# Altium PCB Test_Monitor_PCB1.PcbDoc (part 3 of 3)
Units mm, origin at the board's own origin, x right, y up, seen from the top; angles counter-clockwise.
Board outline 100 x 83 mm, 4 copper layers (Top Layer, GND1, GND2, Bottom Layer), stack 1.57 mm thick; 215 components, 124 nets, 896 pads, 300 vias.
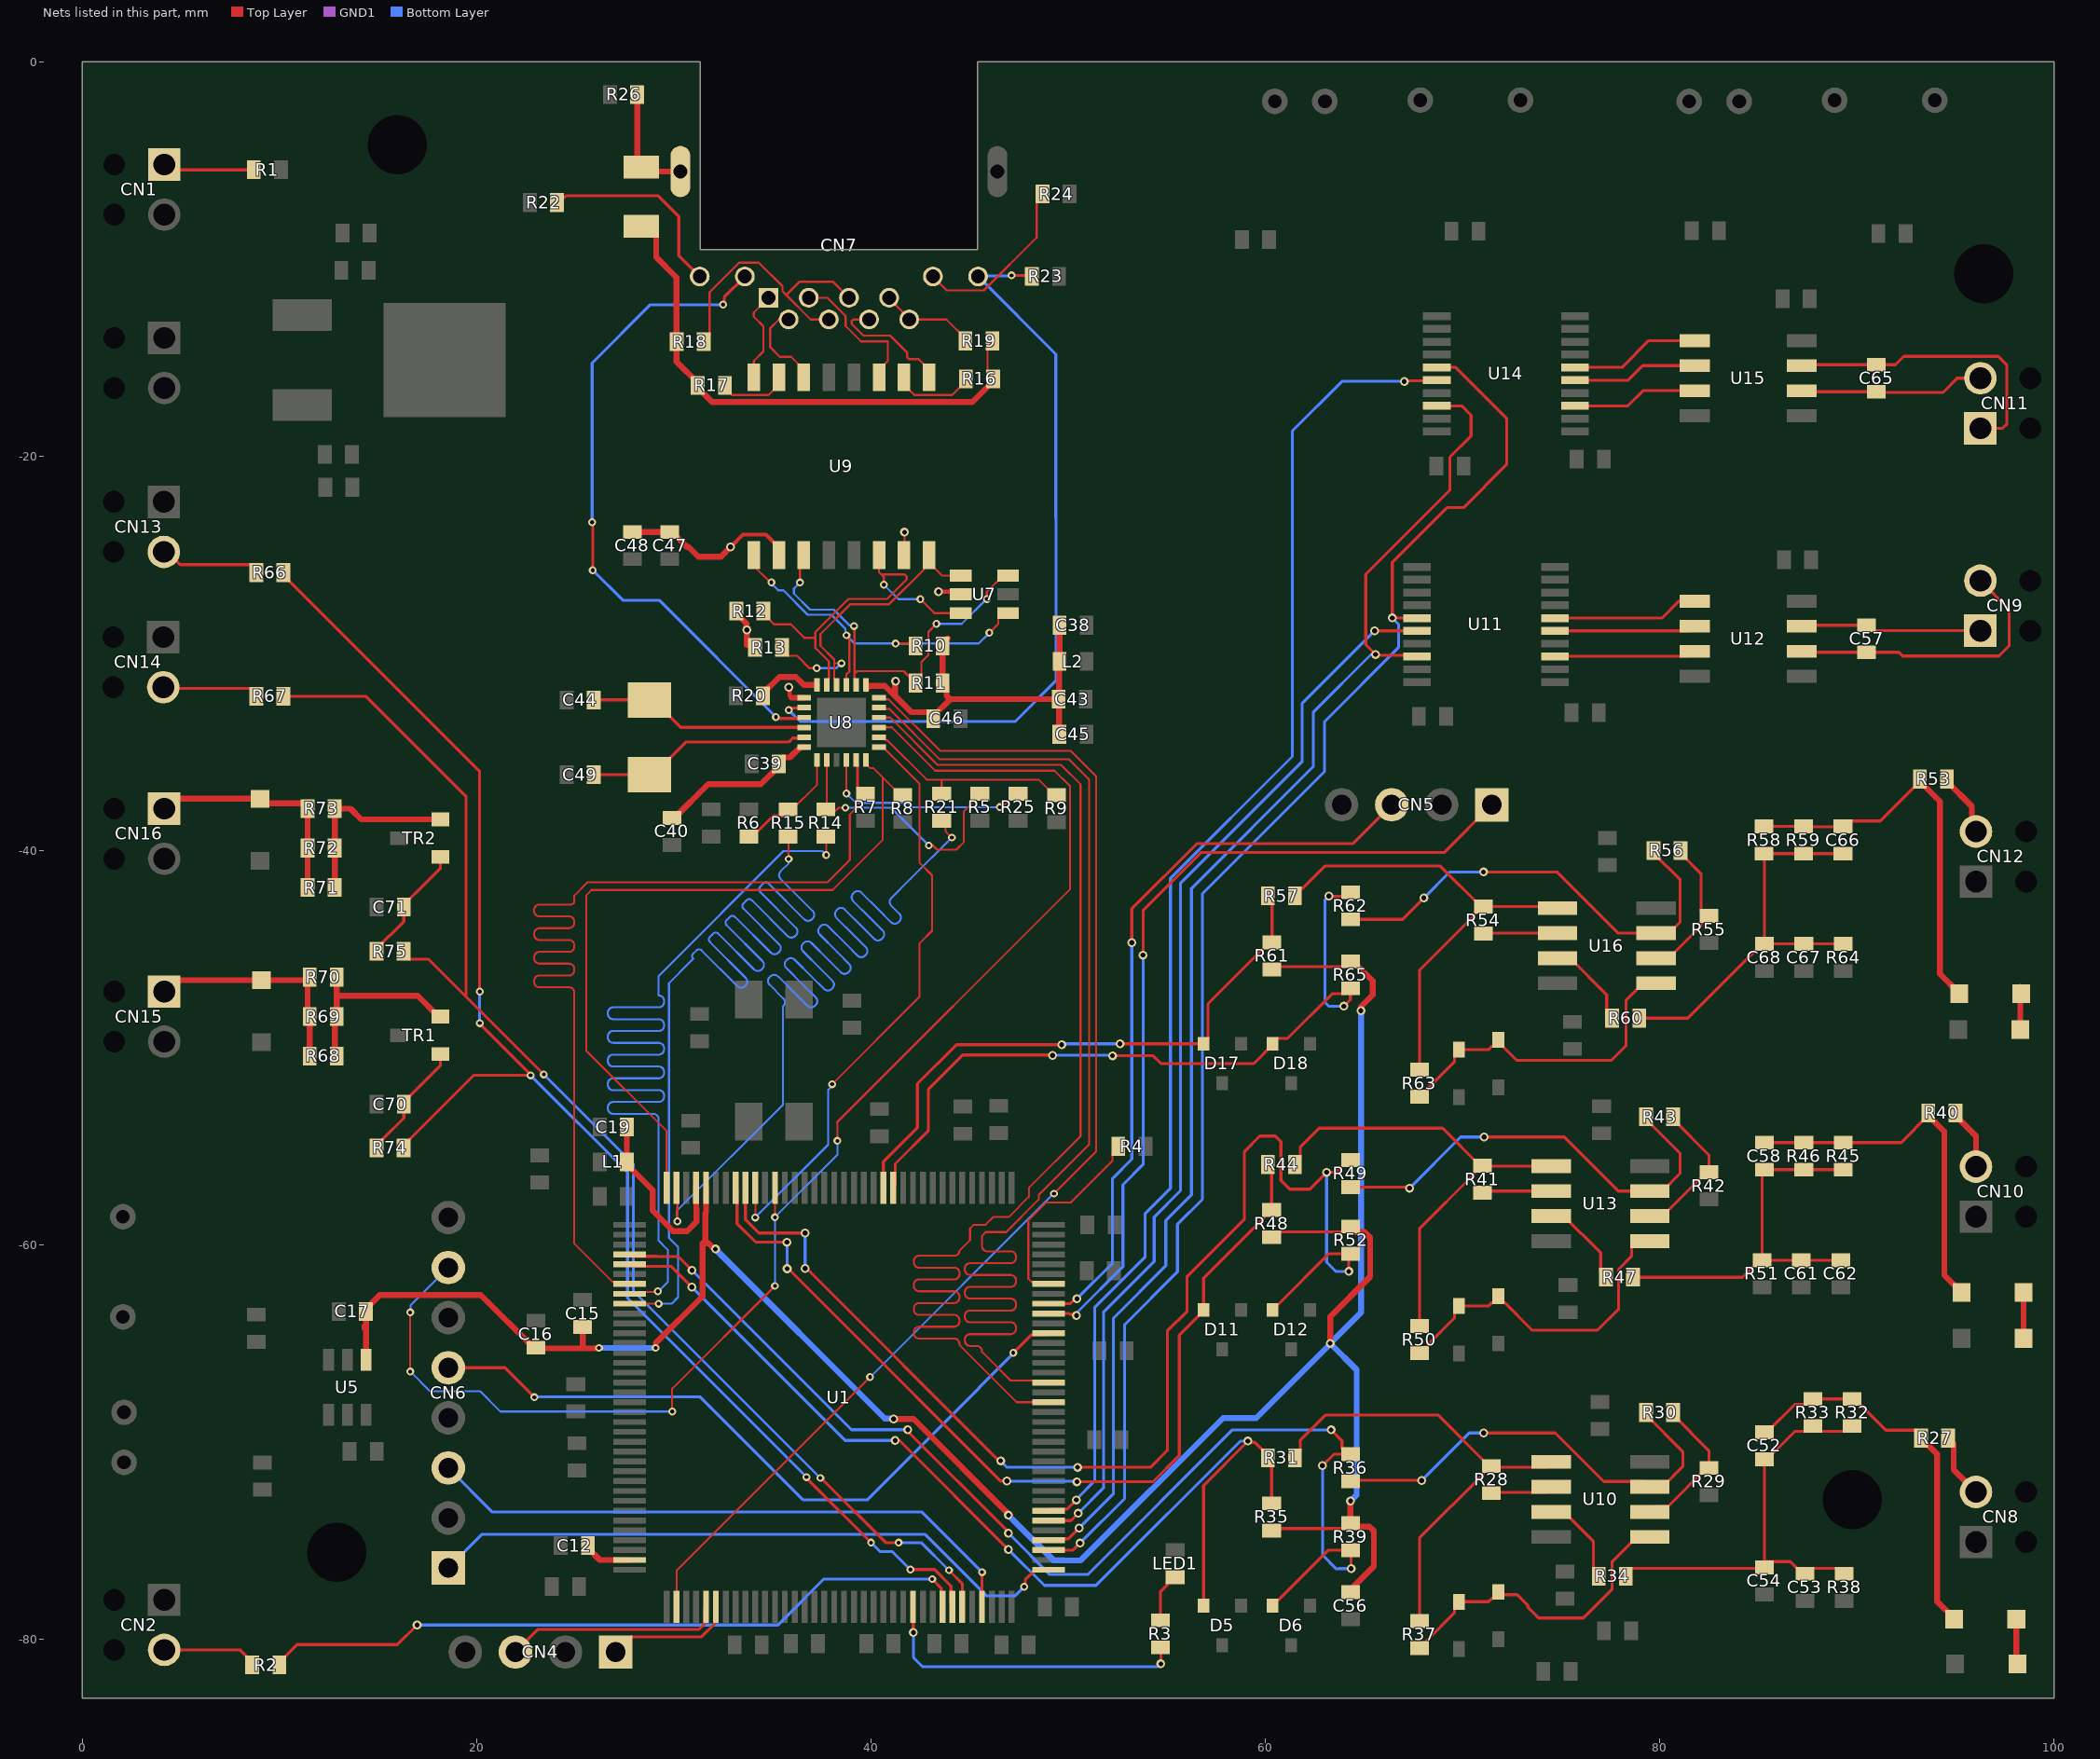
[diagram p4: the nets of this part, all layers, seen from the top]

## Via types
v1: diameter 0.45, hole 0.25, Top Layer to Bottom Layer, 224 vias
v2: diameter 0.4, hole 0.2, Top Layer to Bottom Layer, 66 vias
v3: diameter 0.7, hole 0.4, Top Layer to Bottom Layer, 8 vias
v4: diameter 0.66, hole 0.33, Top Layer to Bottom Layer, 2 vias

## Nets (pads, with @x,y where several pads share a name; then routed paths per layer and width w, separated by ;. In a path a pad name is that pad's centre, name@x,y a point inside that pad or via, vN(x,y) a via of type N, cw(c..) or ccw(c..) an arc to the next point about the centre after c; other vN are vias at no path point) (continued)
NetC12_1: C12.1 U1.71 | length 2.5
  Top Layer w0.3: C12.1@25.637,-75.25 25.637,-75.375 26.243,-75.98 U1.71@27.755,-75.98
NetC19_2: C19.2 L1.2 U1.33 | length 9.5
  Top Layer w0.3: L1.2@27.613,-55.788 27.613,-55.893 L1.2@27.616,-55.896 ; C19.2@27.613,-54.025 27.616,-54.029 L1.2@27.616,-55.896 ; U1.33@31.13,-57.105 31.13,-57.78 31.135,-57.785 31.135,-58.147 31.153,-58.165 31.153,-58.817 30.667,-59.303 29.969,-59.303 28.92,-58.253 28.92,-57.22 27.616,-55.916 L1.2@27.616,-55.896
NetC38_2: C38.2 C43.2 C45.2 C46.2 C47.2 C48.2 L2.1 R10.2 R11.2 R12.2 R13.2 U7.5 U8.1 U8.19 U9.2 U9.7 | length 36.1
  Top Layer w0.11: U9.7@41.675,-24.775 U9.7@41.675,-25.01 41.7,-24.985 41.7,-24.75 v1(41.7,-23.85)
  Top Layer w0.2: C47.2@29.79,-23.841 C47.2@29.915,-23.841 ; 30.665,-24.591 30.74,-24.591 ; v1(32.878,-24.6) 33.503,-23.975 34.67,-23.975 35.325,-24.63 U9.2@35.325,-25.01 ; R12.2@33.162,-27.85 R12.2@33.162,-27.832 ; R13.2@33.991,-29.578 R13.2@34.112,-29.7 ; v1(35.825,-31.715) 35.873,-31.763 35.873,-32.149 35.974,-32.25 ; U9.7@41.675,-24.775 U9.7@41.7,-24.75 ; v1(43.425,-26.871) 44.421,-26.871 U7.5@44.55,-27
  Top Layer w0.3: C48.2@27.895,-23.841 C47.2@29.79,-23.841 ; C47.2@29.915,-23.841 30.665,-24.591 ; 30.74,-24.591 31.24,-25.091 32.387,-25.091 v1(32.878,-24.6) ; R12.2@33.162,-27.85 33.162,-27.975 33.671,-28.484 33.671,-28.771 v1(33.7,-28.8) 33.7,-29.578 R13.2@33.991,-29.578 ; 35.974,-32.25 U8.1@36.6,-32.25 ; U8.19@39.75,-31.805 39.916,-31.639 40.698,-31.639 41.159,-32.1 ; v1(41.25,-31.41) 41.221,-31.439 41.221,-32.038 41.159,-32.1 ; C46.2@43.157,-33.305 C46.2@43.157,-33.18 ; R10.2@43.883,-29.239 43.633,-29.489 R10.2@43.633,-29.614 R11.2@43.633,-31.5 43.833,-31.7 43.833,-32.136 44.017,-32.32 ; C45.2@49.557,-34.225 C45.2@49.557,-34.1 49.535,-34.078 49.535,-32.343 C43.2@49.512,-32.32 ; C38.2@49.562,-28.57 L2.1@49.563,-30.411 49.538,-30.436 49.538,-32.295 C43.2@49.512,-32.32 ; 41.159,-32.1 42.039,-32.98 42.957,-32.98 C46.2@43.157,-33.18 ; C46.2@43.157,-33.18 44.017,-32.32 ; 44.017,-32.32 C43.2@49.512,-32.32
NetC39_2: C39.2 C40.2 U8.6 | length 8.3
  Top Layer w0.3: C40.2@29.9,-38.342 30.025,-38.342 31.742,-36.625 34.417,-36.625 35.317,-35.725 C39.2@35.317,-35.6 35.317,-35.475 35.518,-35.275 35.89,-35.275 36.415,-34.75 U8.6@36.6,-34.75
NetC42_1: C42.1 CN7.13 R26.2 | length 5.8
  Top Layer w0.3: R26.2@28.139,-1.65 28.139,-5.116 28.583,-5.56 CN7.13@30.33,-5.56
NetC42_2: C42.2 R16.1 R17.1 R18.1 R19.1 | length 27.7
  Top Layer w0.11: R19.1@46.162,-14.15 45.912,-14.4 45.912,-15.8 R16.1@46.187,-16.075
  Top Layer w0.3: C42.2@28.35,-8.327 28.675,-8.327 29.1,-8.752 29.1,-9.897 30.138,-10.935 R18.1@30.138,-14.065 ; R18.1@29.937,-13.865 R18.1@30.138,-14.065 ; R17.1@31.213,-16.4 31.213,-16.525 31.938,-17.25 45.137,-17.25 46.187,-16.2 R16.1@46.187,-16.075 ; R17.1@31.213,-16.275 30.138,-15.2 R18.1@30.138,-14.19 R18.1@30.138,-14.065
NetC44_2: C44.2 U8.4 X2.2 | length 11.4
  Top Layer w0.147: C44.2@25.935,-32.355 X2.2@28.75,-32.355 ; U8.4@36.6,-33.75 30.345,-33.75 X2.2@28.95,-32.355 ; X2.2@28.75,-32.355 X2.2@28.95,-32.355 ; X2.2@28.75,-32.355 X2.2@28.95,-32.355
NetC49_2: C49.2 U8.5 X2.1 | length 11.5
  Top Layer w0.147: C49.2@25.935,-36.155 X2.1@28.75,-36.155 28.95,-36.155 30.605,-34.5 35.82,-34.5 36.03,-34.29 36.56,-34.29 U8.5@36.6,-34.25
NetC52_1: C52.1 C53.2 C54.2 R32.1 R33.1 R34.1 R38.2 | length 22.4
  Top Layer w0.15: R34.1@78.287,-76.8 78.287,-76.675 78.562,-76.4 85.272,-76.4 C54.2@85.318,-76.354 C54.2@85.318,-76.062 ; C52.1@85.318,-71.175 C54.2@85.318,-76.062 ; C52.1@85.318,-70.875 85.442,-70.875 86.855,-69.462 87.493,-69.462 R33.1@87.768,-69.187 88.043,-69.462 89.493,-69.462 R32.1@89.768,-69.187 ; C53.2@87.318,-76.679 87.593,-76.404 89.093,-76.404 R38.2@89.368,-76.679 ; C53.2@87.368,-76.679 87.243,-76.679 86.626,-76.062 C54.2@85.318,-76.062
NetC52_2: C52.2 D1.1 R27.2 R32.2 R33.2 | length 19.1
  Top Layer w0.15: C52.2@85.318,-69.5 85.442,-69.5 86.855,-68.087 87.493,-68.087 R33.2@87.768,-67.812 89.893,-67.812 91.48,-69.4 92.987,-69.4 93.262,-69.675 R27.2@93.262,-69.8
  Top Layer w0.3: R27.2@93.509,-70.046 94.077,-70.614 94.077,-78.082 94.945,-78.95 D1.1@94.945,-78.975
NetC57_1: C57.1 CN9.1 U12.3 | length 9.2
  Top Layer w0.15: U12.3@87.212,-28.62 87.264,-28.568 C57.1@90.5,-28.568 90.775,-28.843 96.263,-28.843 CN9.1@96.27,-28.85
NetC57_2: C57.2 CN9.2 U12.2 | length 14.7
  Top Layer w0.15: U12.2@87.212,-29.89 87.265,-29.943 C57.2@90.5,-29.943 92.133,-29.943 92.32,-30.13 97.21,-30.13 97.73,-29.61 97.73,-27.77 CN9.2@96.27,-26.31
NetC58_1: C58.1 C61.2 C62.2 R45.1 R46.1 R47.1 R51.2 | length 19.5
  Top Layer w0.15: R47.1@78.657,-61.64 84.205,-61.64 85.068,-60.777 R51.2@85.192,-60.777 ; C62.2@89.192,-60.777 C61.2@87.192,-60.777 R51.2@85.192,-60.777 ; R45.1@89.317,-56.182 R46.1@87.318,-56.182 C58.1@85.318,-56.182 85.192,-56.307 R51.2@85.192,-60.777
NetC58_2: C58.2 D7.1 R40.2 R45.2 R46.2 | length 18.6
  Top Layer w0.15: C58.2@85.318,-54.807 R46.2@87.318,-54.807 R45.2@89.317,-54.807 92.247,-54.807 R40.2@93.63,-53.425
  Top Layer w0.3: R40.2@93.63,-53.425 94.44,-54.235 94.44,-61.518 95.318,-62.395 D7.1@95.318,-62.42
NetC65_1: C65.1 CN11.1 U15.3 | length 15.2
  Top Layer w0.15: U15.3@87.212,-15.405 87.264,-15.353 C65.1@91,-15.353 91.962,-15.353 92.385,-14.93 97.165,-14.93 97.615,-15.38 97.615,-18.36 97.395,-18.58 CN11.1@96.27,-18.58
NetC65_2: C65.2 CN11.2 U15.2 | length 9.4
  Top Layer w0.15: U15.2@87.212,-16.675 87.265,-16.728 C65.2@91,-16.728 91.033,-16.76 94.375,-16.76 95.095,-16.04 CN11.2@96.27,-16.04
NetC66_1: C66.1 C67.2 C68.2 R58.1 R59.1 R60.1 R64.2 | length 20.5
  Top Layer w0.15: R60.1@78.967,-48.5 81.425,-48.5 85.193,-44.732 C68.2@85.318,-44.732 ; C66.1@89.302,-40.152 R59.1@87.302,-40.152 R58.1@85.302,-40.152 85.318,-40.167 C68.2@85.318,-44.732 ; R64.2@89.317,-44.732 C67.2@87.318,-44.732 C68.2@85.318,-44.732
NetC66_2: C66.2 D13.1 R53.2 R58.2 R59.2 | length 20.5
  Top Layer w0.15: R58.2@85.302,-38.777 R59.2@87.302,-38.777 87.322,-38.797 89.282,-38.797 89.577,-38.502 91.195,-38.502 R53.2@93.202,-36.495
  Top Layer w0.3: R53.2@93.202,-36.495 94.22,-37.513 94.22,-46.255 95.2,-47.235 D13.1@95.2,-47.26
NetC70_1: C70.1 R74.2 TR1.1 | length 6.1
  Top Layer w0.15: R74.2@14.912,-55.074 14.912,-54.949 15.74,-54.122 15.745,-54.122 16.297,-53.57 C70.1@16.297,-52.87 16.297,-52.745 17.36,-51.682 17.373,-51.682 18.16,-50.895 TR1.1@18.16,-50.32
NetC71_1: C71.1 R75.2 TR2.1 | length 6.1
  Top Layer w0.15: R75.2@14.912,-45.107 14.912,-44.982 16.297,-43.597 C71.1@16.297,-42.87 16.297,-42.745 17.36,-41.682 17.373,-41.682 18.16,-40.895 TR2.1@18.16,-40.32
NetCN1_1: CN1.1 R1.2 | length 4.7
  Top Layer w0.15: CN1.1@4.42,-5.47 R1.2@8.692,-5.47
  Top Layer w0.2: CN1.1@4.15,-5.2 CN1.1@4.42,-5.47
NetCN2_2: CN2.2 R2.2 | length 4.8
  Top Layer w0.15: CN2.2@4.25,-80.54 7.977,-80.54 8.612,-81.175 R2.2@8.612,-81.3
NetCN5_1: CN5.1 U1.135 | length 43.3
  Top Layer w0.15: U1.135@49.005,-63.48 50.055,-63.48 50.093,-63.518 50.368,-63.518 v1(50.425,-63.575) ; v1(53.8,-45.3) 53.8,-43.035 56.735,-40.1 69.065,-40.1 CN5.1@71.49,-37.675
  Bottom Layer w0.15: v1(50.425,-63.575) 50.425,-63.45 52.775,-61.1 52.775,-56.95 53.8,-55.925 v1(53.8,-45.3)
NetCN5_3: CN5.3 U1.136 | length 37.8
  Top Layer w0.15: U1.136@49.005,-62.98 50.109,-62.98 50.364,-62.725 v1(50.445,-62.725) ; v1(53.225,-44.675) 53.225,-42.95 56.525,-39.65 64.435,-39.65 CN5.3@66.41,-37.675
  Bottom Layer w0.15: v1(50.445,-62.725) 52.25,-60.92 52.25,-56.625 53.225,-55.65 v1(53.225,-44.675)
NetCN6_1: CN6.1 U1.109 | length 33.2
  Top Layer w0.15: v2(47.77,-77.335) 47.818,-77.287 47.818,-76.992 48.33,-76.48 U1.109@49.005,-76.48
  Bottom Layer w0.15: CN6.1@18.561,-76.39 20.276,-74.675 42.726,-74.675 45.846,-77.795 47.31,-77.795 v2(47.77,-77.335)
NetCN6_3: CN6.3 U1.105 | length 31
  Top Layer w0.15: U1.105@45.63,-78.355 v2(45.63,-76.6)
  Bottom Layer w0.15: CN6.3@18.561,-71.31 20.801,-73.55 31.55,-73.55 34.2,-73.55 42.58,-73.55 v2(45.63,-76.6)
NetCN6_5: CN6.5 U1.133 | length 36.8
  Top Layer w0.15: CN6.5@18.561,-66.23 21.43,-66.23 v2(22.925,-67.725) ; v2(47.217,-65.475) 48.137,-64.555 48.93,-64.555 U1.133@49.005,-64.48
  Bottom Layer w0.15: v2(22.925,-67.725) 22.938,-67.712 31.333,-67.712 36.545,-72.925 39.825,-72.925 45.475,-67.275 45.475,-67.246 47.217,-65.504 v2(47.217,-65.475)
NetCN6_7: CN6.7 U1.25 U8.15 | length 72.7
  Top Layer w0.1: v2(16.625,-66.425) v2(16.625,-63.425) ; v2(29.915,-68.45) 29.915,-67.292 v2(35.127,-62.08) ; v2(35.125,-58.6) v2@35.127,-58.602 ; v2@35.13,-58.595 U1.25@35.13,-57.105 ; v2(38.295,-54.725) 38.295,-53.801 38.275,-53.781 50.098,-41.958 50.098,-36.74 49.304,-35.945 43.25,-35.945 41.055,-33.75 U8.15@40.4,-33.75
  Top Layer w0.3: v2(35.125,-58.6) v2@35.13,-58.595
  Bottom Layer w0.1: v2(16.625,-66.425) 17.625,-67.425 20.175,-67.425 21.2,-68.45 v2(29.915,-68.45) ; v2(16.625,-63.425) 16.636,-63.414 16.636,-63.075 CN6.7@18.561,-61.15 ; v2(35.127,-62.08) v2(35.127,-62.08) 35.126,-58.601 v2(35.125,-58.6) 38.295,-55.43 v2(38.295,-54.725)
NetCN7_4: CN7.4 CN7.5 R18.2 | length 14.4
  Top Layer w0.11: R18.2@31.512,-14.19 31.808,-13.895 31.808,-11.675 33.308,-10.175 34.305,-10.175 35.505,-11.375 35.505,-11.622 35.704,-11.821 ; CN7.4@37.86,-13.06 36.943,-13.06 35.704,-11.821 ; CN7.5@38.88,-11.96 38.06,-11.14 36.385,-11.14 35.704,-11.821
NetCN7_7: CN7.7 CN7.8 R19.2 | length 4.9
  Top Layer w0.11: CN7.7@40.92,-11.96 40.92,-12 41.94,-13.02 CN7.8@41.94,-13.06 43.822,-13.06 44.787,-14.025 R19.2@44.787,-14.15
NetCN7_9: CN7.9 R22.2 | length 10.4
  Top Layer w0.15: R22.2@24.071,-7.127 24.071,-7.252 24.541,-6.782 29.182,-6.782 30.245,-7.845 30.245,-9.815 CN7.9@31.31,-10.88
NetCN7_10: CN7.10 U8.3 | length 34.1
  Top Layer w0.147: v2(25.85,-23.35) 25.885,-23.385 v2(25.885,-25.78) ; v2(32.5,-12.31) 32.548,-12.262 32.548,-11.932 CN7.10@33.6,-10.88 ; v2(35.175,-33.225) 35.243,-33.225 35.317,-33.298 36.552,-33.298 U8.3@36.6,-33.25
  Bottom Layer w0.147: v2(25.85,-23.35) 25.85,-15.27 28.81,-12.31 v2(32.5,-12.31) ; v2(25.885,-25.78) 27.405,-27.3 29.25,-27.3 v2(35.175,-33.225)
NetCN7_11: CN7.11 R24.2 | length 9
  Top Layer w0.11: CN7.11@43.14,-10.88 43.845,-11.585 45.722,-11.585 48.405,-8.902 48.405,-6.995 R24.2@48.7,-6.7
NetCN7_12: CN7.12 R23.2 U8.2 | length 40.3
  Top Layer w0.147: v2(35.825,-32.875) 35.852,-32.875 35.967,-32.76 36.59,-32.76 U8.2@36.6,-32.75 ; v2(47.13,-10.825) 48.112,-10.825 R23.2@48.162,-10.875
  Bottom Layer w0.147: v2(35.825,-32.875) 36.404,-33.454 47.318,-33.454 49.382,-31.39 49.382,-23.157 49.375,-23.15 49.375,-14.825 45.561,-11.011 45.561,-10.88 CN7.12@45.43,-10.88 ; CN7.12@45.561,-10.843 45.571,-10.853 47.102,-10.853 v2(47.13,-10.825)
NetCN8_2: CN8.2 R27.1 | length 3.3
  Top Layer w0.15: R27.1@94.637,-69.8 R27.1@94.912,-70.075
  Top Layer w0.3: R27.1@94.912,-70.075 94.912,-71.395 CN8.2@96.047,-72.53
NetCN10_2: CN10.2 R40.1 | length 3.2
  Top Layer w0.3: R40.1@95.005,-53.3 95.005,-53.425 96.047,-54.468 CN10.2@96.047,-56.03
NetCN12_2: CN12.2 R53.1 | length 3.3
  Top Layer w0.3: R53.1@94.577,-36.37 94.577,-36.495 95.837,-37.755 95.837,-38.82 CN12.2@96.047,-39.03
NetCN13_2: CN13.2 R66.2 | length 5.2
  Top Layer w0.15: CN13.2@4.125,-24.85 4.309,-24.85 4.959,-25.501 8.537,-25.501 8.812,-25.776 R66.2@8.812,-25.901
NetCN14_2: CN14.2 R67.2 | length 5
  Top Layer w0.15: CN14.2@4.1,-31.715 4.155,-31.77 8.537,-31.77 8.812,-32.045 R67.2@8.812,-32.17
NetCN15_1: CN15.1 D19.2 R68.2 R69.2 R70.2 | length 11.3
  Top Layer w0.147: R70.2@11.423,-46.575 11.423,-46.52 R70.2@11.523,-46.42
  Top Layer w0.15: R69.2@11.423,-48.32 R69.2@11.523,-48.42
  Top Layer w0.3: CN15.1@4.37,-47.15 4.945,-46.575 R70.2@11.368,-46.575 ; R69.2@11.423,-48.32 R70.2@11.423,-46.575 ; R68.2@11.523,-50.42 R69.2@11.523,-48.42
NetCN16_1: CN16.1 D20.2 R71.2 R72.2 R73.2 | length 11.6
  Top Layer w0.15: D20.2@9,-37.37 D20.2@9.225,-37.595 ; R73.2@11.147,-37.595 R73.2@11.422,-37.87
  Top Layer w0.3: CN16.1@4.77,-37.37 D20.2@9,-37.37 ; D20.2@9.225,-37.595 R73.2@11.147,-37.595 ; R71.2@11.422,-41.87 R72.2@11.422,-39.87 R73.2@11.422,-37.87
  Top Layer w0.381: CN16.1@4.27,-37.87 CN16.1@4.77,-37.37
NetD1_2: D1.2 D2.2 | length 2.3
  Top Layer w0.3: D1.2@98.095,-78.975 98.095,-81.205 D2.2@98.145,-81.255
NetD3_2: D3.2 D4.1 R37.1 U10.5 | length 16.3
  Top Layer w0.15: R37.1@67.817,-80.447 67.942,-80.447 68.217,-80.172 68.217,-80.047 69.593,-78.672 69.593,-78.325 D3.2@69.818,-78.1 71.318,-78.1 71.493,-77.925 71.593,-77.925 71.818,-77.7 D4.1@71.818,-77.6 71.818,-77.592 71.97,-77.745 72.77,-77.745 73.317,-78.292 73.317,-78.378 73.864,-78.925 76.125,-78.925 77.595,-77.455 77.595,-76.065 78.85,-74.81 U10.5@79.5,-74.81
NetD5_2: D5.2 R31.2 R35.1 U1.41 | length 54.3
  Top Layer w0.1: v1(41.225,-69.92) 41.445,-69.92 41.465,-69.94
  Top Layer w0.15: U1.41@27.755,-60.98 27.855,-61.08 29.845,-61.08 v1(30.905,-62.14) ; 41.465,-69.94 v1(46.97,-75.445) ; D5.2@56.867,-78.3 56.867,-72.203 v1(59.12,-69.95) 59.187,-70.017 59.197,-70.007 59.462,-70.007 60.317,-70.863 R35.1@60.317,-73.113
  Bottom Layer w0.15: v1(30.905,-62.14) 38.685,-69.92 v1(41.225,-69.92) ; v1(46.97,-75.445) 48.795,-77.27 51.415,-77.27 58.735,-69.95 v1(59.12,-69.95)
NetD6_2: D6.2 R36.2 R39.1 U1.40 | length 60.8
  Top Layer w0.1: v1@41.865,-69.457 v1(41.865,-69.37)
  Top Layer w0.15: U1.40@27.755,-60.48 27.855,-60.58 29.14,-60.58 29.15,-60.59 30.225,-60.59 v1(30.92,-61.285) ; v1@41.865,-69.457 v1@46.87,-74.462 ; D6.2@60.367,-78.3 60.367,-78.25 60.592,-78.025 60.642,-78.025 63.18,-75.487 R39.1@64.317,-75.487 64.35,-75.52 v1(64.35,-76.42) ; v1(62.9,-71.19) 63.478,-70.612 R36.2@64.193,-70.612 ; v1(63.335,-69.38) 63.892,-69.938 63.892,-70.312 R36.2@64.193,-70.612 ; R36.2@64.317,-70.612 R36.2@64.193,-70.612
  Bottom Layer w0.15: v1(30.92,-61.285) 39.005,-69.37 v1(41.865,-69.37) ; v1@47.045,-74.62 47.045,-74.695 49.07,-76.72 50.995,-76.72 58.335,-69.38 v1(63.335,-69.38) ; v1(62.9,-71.19) 62.9,-75.72 63.613,-76.433 63.737,-76.433 63.75,-76.42 v1(64.35,-76.42)
  other v1: 46.97,-74.62
NetD7_2: D7.2 D8.2 | length 2.3
  Top Layer w0.15: D7.2@98.46,-62.428 D7.2@98.467,-62.42
  Top Layer w0.3: D8.2@98.46,-64.74 D7.2@98.46,-62.428
NetD9_2: D9.2 D10.1 R50.1 U13.5 | length 17.3
  Top Layer w0.15: R50.1@67.817,-65.487 67.942,-65.487 68.217,-65.212 68.217,-65.087 69.593,-63.712 69.593,-63.325 D9.2@69.818,-63.1 71.318,-63.1 71.493,-62.925 71.593,-62.925 D10.1@71.818,-62.7 ; D10.1@71.818,-62.6 D10.1@71.818,-62.7 ; U13.5@79.5,-59.81 78.85,-59.81 78.575,-60.085 78.575,-60.579 77.925,-61.229 77.925,-63.25 76.85,-64.325 73.542,-64.325 72.143,-62.925 72.043,-62.925 D10.1@71.818,-62.7
NetD11_2: D11.2 R44.2 R48.1 U1.29 | length 47.9
  Top Layer w0.15: U1.29@33.13,-57.105 33.205,-57.18 33.205,-58.92 34.145,-59.86 v1(35.73,-59.86) ; v1(35.745,-61.205) 35.8,-61.205 41.325,-66.73 43.11,-68.515 46.565,-71.97 v1(46.885,-71.97) ; v1(50.445,-72.01) 54.3,-72.01 55.635,-70.675 55.635,-64.583 56.867,-63.35 D11.2@56.867,-63.3 56.867,-61.683 59.918,-58.633 59.918,-58.508 60.193,-58.233 R48.1@60.317,-58.233 60.317,-56.108 R44.2@60.13,-55.92
  Bottom Layer w0.15: v1(35.73,-59.86) 35.738,-59.868 35.738,-61.198 v1(35.745,-61.205) ; v1(46.885,-71.97) 46.905,-71.99 50.425,-71.99 v1(50.445,-72.01)
NetD12_2: D12.2 R49.2 R52.1 U1.28 | length 66.1
  Top Layer w0.15: 33.63,-57.95 33.63,-58.709 34.316,-59.395 v1(36.65,-59.395) ; v1(36.66,-61.19) 36.738,-61.19 46.498,-70.95 v1(46.575,-70.95) ; v1(50.475,-71.28) 54.175,-71.28 55.03,-70.425 55.03,-64.365 56.035,-63.36 56.035,-61.595 58.94,-58.69 58.94,-55.255 59.715,-54.48 60.51,-54.48 60.79,-54.76 60.79,-56.73 61.235,-57.175 62.25,-57.175 v1(63.11,-56.315) 63.57,-56.315 64.193,-55.692 R49.2@64.317,-55.692 ; D12.2@60.367,-63.3 60.367,-63.25 60.592,-63.025 60.642,-63.025 63.225,-60.442 R52.1@64.33,-60.442 64.235,-60.537 v1(64.235,-61.345)
  Bottom Layer w0.15: v1(36.65,-59.395) 36.655,-59.4 36.655,-61.185 v1(36.66,-61.19) ; v1(46.575,-70.95) 46.905,-71.28 v1(50.475,-71.28) ; v1(63.11,-56.315) 63.11,-60.875 63.58,-61.345 v1(64.235,-61.345)
NetD13_2: D13.2 D14.2 | length 2.3
  Top Layer w0.15: D13.2@98.295,-46.823 98.295,-47.205 D13.2@98.35,-47.26
  Top Layer w0.3: D14.2@98.295,-49.07 98.295,-47.315 D13.2@98.35,-47.26
NetD15_2: D15.2 D16.1 R63.1 U16.5 | length 16.9
  Top Layer w0.15: R63.1@67.817,-52.487 67.942,-52.487 68.217,-52.212 68.217,-52.087 69.593,-50.712 69.593,-50.325 D15.2@69.818,-50.1 71.318,-50.1 71.493,-49.925 71.593,-49.925 D16.1@71.818,-49.7 ; D16.1@71.818,-49.6 D16.1@71.818,-49.7 ; U16.5@79.818,-46.73 79.168,-46.73 78.29,-47.607 78.29,-49.905 77.558,-50.637 72.755,-50.637 D16.1@71.818,-49.7
NetD17_2: D17.2 R57.2 R61.1 U1.14 | length 30.6
  Top Layer w0.15: U1.14@40.73,-57.005 U1.14@40.63,-57.105 40.63,-55.785 42.355,-54.06 42.355,-51.82 44.33,-49.845 v1(49.67,-49.845) ; v1(52.625,-49.8) D17.2@56.867,-49.8 57.092,-49.575 57.092,-47.775 60.215,-44.653 R61.1@60.34,-44.653 60.34,-42.51 R57.2@60.13,-42.3
  Bottom Layer w0.15: v1(49.67,-49.845) 49.715,-49.8 v1(52.625,-49.8)
NetD18_2: D18.2 R62.2 R65.1 U1.13 | length 38.4
  Top Layer w0.15: U1.13@41.13,-57.105 41.23,-57.005 41.23,-55.888 42.915,-54.203 42.915,-52.095 44.645,-50.365 49.19,-50.365 v1(49.21,-50.385) ; v1(52.25,-50.405) 54.315,-50.405 54.715,-50.805 59.412,-50.805 60.367,-49.85 D18.2@60.367,-49.8 60.367,-49.75 60.592,-49.525 61.124,-49.525 63.386,-47.262 64.042,-47.262 R65.1@64.317,-46.987 64.317,-47.563 v1(63.985,-47.895) ; v1(63.23,-42.31) 64.12,-42.31 R62.2@64.317,-42.112
  Bottom Layer w0.15: v1(49.21,-50.385) 52.21,-50.385 52.23,-50.405 v1(52.25,-50.405) ; v1(63.23,-42.31) 63.02,-42.52 63.02,-47.685 63.23,-47.895 v1(63.985,-47.895)
NetLED1_1: LED1.1 R3.2 | length 2.6
  Top Layer w0.15: R3.2@54.675,-79.04 54.675,-77.6 55.025,-77.25 55.025,-77.125 55.3,-76.85 LED1.1@55.425,-76.85
NetR2_1: R2.1 U1.101 | length 36.6
  Top Layer w0.15: R2.1@9.987,-81.3 9.987,-81.175 10.891,-80.271 15.979,-80.271 v1(16.975,-79.275) ; v2(43.1,-76.95) 43.555,-77.405 43.555,-78.28 U1.101@43.63,-78.355
  Bottom Layer w0.15: v1(16.975,-79.275) 35.279,-79.275 37.604,-76.95 v2(43.1,-76.95)
NetR3_1: R3.1 U1.98 | length 16.2
  Top Layer w0.15: U1.98@42.13,-78.355 42.14,-78.365 42.14,-79.64 v1(42.15,-79.65) ; R3.1@54.675,-80.415 54.7,-80.44 v1(54.7,-81.25)
  Bottom Layer w0.15: v1(42.15,-79.65) 42.15,-80.925 42.625,-81.4 54.55,-81.4 v1(54.7,-81.25)
NetR4_2: R4.2 U1.138 | length 10.5
  Top Layer w0.1: U1.138@49.005,-61.98 48.905,-61.88 48.147,-61.88 47.98,-61.713 47.98,-58.747 48.887,-57.84 50.141,-57.84 52.242,-55.738 52.242,-55.3 R4.2@52.542,-55
NetR5_1: R5.1 R14.2 U8.8 | length 13.8
  Top Layer w0.1: R14.2@37.7,-37.912 37.732,-37.945 37.988,-38.2 38.363,-37.825 v2(38.7,-37.825) ; R14.2@37.75,-37.927 U8.8@37.75,-35.4 ; v2(42.932,-39.741) 43.146,-39.741 43.355,-39.95 44.325,-39.95 44.71,-39.565 44.71,-38.01 45.095,-37.625 45.095,-37.413 45.395,-37.113 R5.1@45.52,-37.113
  Top Layer w0.147: R14.2@37.714,-37.962 37.732,-37.945 R14.2@37.75,-37.927
  Bottom Layer w0.1: v2(38.7,-37.825) 41.016,-37.825 v2(42.932,-39.741)
NetR6_1: R6.1 R15.2 U8.7 | length 5.8
  Top Layer w0.1: R15.2@35.959,-37.962 37.25,-36.672 U8.7@37.25,-35.4
  Top Layer w0.147: R6.1@33.81,-39.337 33.935,-39.337 35.033,-38.239 35.558,-38.239 35.834,-37.962 R15.2@35.959,-37.962
NetR7_1: R7.1 U1.43 U8.11 | length 56.1
  Top Layer w0.1: U1.43@27.755,-61.98 27.655,-61.88 26.897,-61.88 24.95,-59.933 24.95,-49.635 24.95,-49.335 24.95,-48.735 24.95,-48.135 24.95,-47.535 24.95,-47.205 ccw(c24.68,-47.205) 24.68,-46.935 23.184,-46.935 cw(c23.184,-46.665) 22.914,-46.665 22.914,-46.605 cw(c23.184,-46.605) 23.184,-46.335 24.68,-46.335 ccw(c24.68,-46.065) 24.95,-46.065 24.95,-46.005 ccw(c24.68,-46.005) 24.68,-45.735 23.184,-45.735 cw(c23.184,-45.465) 22.914,-45.465 22.914,-45.405 cw(c23.184,-45.405) 23.184,-45.135 24.68,-45.135 ccw(c24.68,-44.865) 24.95,-44.865 24.95,-44.805 ccw(c24.68,-44.805) 24.68,-44.535 23.184,-44.535 cw(c23.184,-44.265) 22.914,-44.265 22.914,-44.205 cw(c23.184,-44.205) 23.184,-43.935 24.68,-43.935 ccw(c24.68,-43.665) 24.95,-43.665 24.95,-43.605 ccw(c24.68,-43.605) 24.68,-43.335 23.184,-43.335 cw(c23.184,-43.065) 22.914,-43.065 22.914,-43.005 cw(c23.184,-43.005) 23.184,-42.735 24.765,-42.735 ccw(c24.765,-42.55) 24.95,-42.55 24.95,-42.275 25.625,-41.6 37.8,-41.6 38.925,-40.475 38.925,-38.177 39.297,-37.805 39.297,-37.413 39.597,-37.113 R7.1@39.722,-37.113
  Top Layer w0.147: U8.11@39.25,-35.4 39.25,-35.605 39.32,-35.675 39.32,-36.836 R7.1@39.597,-37.113
NetR8_2: R8.2 U1.36 U8.12 | length 38.3
  Top Layer w0.1: U1.36@29.63,-57.105 29.63,-54.225 25.55,-50.145 25.55,-42.275 25.825,-42 38.05,-42 40.587,-39.463 40.587,-36.285 ; U8.12@39.75,-35.605 39.97,-35.825 40.127,-35.825 40.587,-36.285 ; R8.2@41.477,-37.175 40.587,-36.285
NetR9_1: R9.1 R21.2 U8.14 | length 10.9
  Top Layer w0.1: U8.14@40.4,-34.25 40.605,-34.25 40.765,-34.41 40.828,-34.41 42.821,-36.403 43.58,-36.403 ; R21.2@43.58,-37.112 43.58,-36.403 ; R9.1@49.4,-37.183 49.275,-37.183 48.496,-36.403 43.58,-36.403
NetR14_1: R14.1 U1.44 | length 56.1
  Top Layer w0.1: U1.44@27.755,-62.48 27.855,-62.38 29.153,-62.38 v2(29.182,-62.351) ; R14.1@37.7,-39.287 37.725,-39.312 v2(37.725,-40.225)
  Bottom Layer w0.1: v2(29.182,-62.351) 29.225,-62.308 29.267,-62.308 29.685,-61.89 29.685,-60.245 29.225,-59.785 29.225,-53.65 29.225,-53.62 ccw(c28.955,-53.62) 28.955,-53.35 26.92,-53.35 cw(c26.92,-53.08) 26.65,-53.08 26.65,-53.02 cw(c26.92,-53.02) 26.92,-52.75 29.225,-52.75 29.23,-52.75 ccw(c29.23,-52.48) 29.5,-52.48 29.5,-52.42 ccw(c29.23,-52.42) 29.23,-52.15 29.225,-52.15 26.92,-52.15 cw(c26.92,-51.88) 26.65,-51.88 26.65,-51.82 cw(c26.92,-51.82) 26.92,-51.55 29.225,-51.55 29.23,-51.55 ccw(c29.23,-51.28) 29.5,-51.28 29.5,-51.22 ccw(c29.23,-51.22) 29.23,-50.95 29.225,-50.95 26.92,-50.95 cw(c26.92,-50.68) 26.65,-50.68 26.65,-50.62 cw(c26.92,-50.62) 26.92,-50.35 29.225,-50.35 29.23,-50.35 ccw(c29.23,-50.08) 29.5,-50.08 29.5,-50.02 ccw(c29.23,-50.02) 29.23,-49.75 29.225,-49.75 26.92,-49.75 cw(c26.92,-49.48) 26.65,-49.48 26.65,-49.42 cw(c26.92,-49.42) 26.92,-49.15 29.225,-49.15 29.23,-49.15 ccw(c29.23,-48.88) 29.5,-48.88 29.5,-48.82 ccw(c29.23,-48.82) 29.23,-48.55 29.225,-48.55 26.92,-48.55 cw(c26.92,-48.28) 26.65,-48.28 26.65,-48.22 cw(c26.92,-48.22) 26.92,-47.95 29.225,-47.95 29.23,-47.95 ccw(c29.23,-47.68) 29.5,-47.68 29.5,-47.62 ccw(c29.23,-47.62) 29.23,-47.35 29.225,-47.35 29.225,-47.02 29.225,-46.356 35.556,-40.025 37.525,-40.025 v2(37.725,-40.225)
NetR15_1: R15.1 U1.45 | length 56.8
  Top Layer w0.1: U1.45@27.755,-62.98 v2(29.225,-62.98) ; R15.1@35.8,-39.287 35.82,-39.307 v2(35.82,-40.425)
  Bottom Layer w0.1: v2(29.225,-62.98) 29.589,-62.98 29.585,-62.976 29.889,-62.976 30.215,-62.65 30.215,-60.11 29.75,-59.645 29.75,-46.72 30.77,-45.7 30.982,-45.488 cw(c31.115,-45.355) 30.982,-45.221 31.14,-45.064 cw(c31.273,-45.197) 31.406,-45.064 33.22,-46.877 ccw(c33.411,-46.686) 33.602,-46.877 33.644,-46.835 ccw(c33.453,-46.644) 33.644,-46.453 31.831,-44.639 cw(c31.964,-44.506) 31.831,-44.373 31.988,-44.215 cw(c32.122,-44.348) 32.255,-44.215 34.069,-46.029 ccw(c34.26,-45.838) 34.45,-46.029 34.493,-45.986 ccw(c34.302,-45.795) 34.493,-45.605 32.679,-43.791 cw(c32.812,-43.658) 32.679,-43.524 32.837,-43.367 cw(c32.97,-43.5) 33.103,-43.367 34.917,-45.18 ccw(c35.108,-44.989) 35.299,-45.18 35.341,-45.138 ccw(c35.151,-44.947) 35.341,-44.756 33.528,-42.942 cw(c33.661,-42.809) 33.528,-42.676 33.685,-42.518 cw(c33.819,-42.651) 33.952,-42.518 35.766,-44.332 ccw(c35.957,-44.141) 36.148,-44.332 36.19,-44.289 ccw(c35.999,-44.098) 36.19,-43.907 34.376,-42.094 cw(c34.51,-41.96) 34.376,-41.827 34.534,-41.669 cw(c34.667,-41.803) 34.801,-41.669 36.614,-43.483 ccw(c36.805,-43.292) 36.996,-43.483 37.038,-43.441 ccw(c36.848,-43.25) 37.038,-43.059 35.41,-41.43 cw(c35.595,-41.245) 35.41,-41.06 35.82,-40.65 v2(35.82,-40.425)
NetR16_2: R16.2 U9.10 | length 4.1
  Top Layer w0.11: U9.10@41.675,-15.99 41.675,-16.37 42.2,-16.895 44.117,-16.895 44.812,-16.2 R16.2@44.812,-16.075
NetR17_2: R17.2 U9.15 | length 3.6
  Top Layer w0.11: R17.2@32.588,-16.4 32.588,-16.525 32.958,-16.895 34.8,-16.895 35.325,-16.37 U9.15@35.325,-15.99
NetR20_2: R20.2 U8.24 | length 3.4
  Top Layer w0.3: R20.2@34.518,-32.15 34.518,-32.025 35.353,-31.19 36.189,-31.19 36.599,-31.6 U8.24@37.25,-31.6
NetR21_1: R21.1 U1.35 | length 56.8
  Top Layer w0.1: U1.35@30.13,-57.105 30.176,-57.151 v2(30.176,-58.803) ; R21.1@43.58,-38.487 43.775,-38.683 43.775,-39.012 v2(44.1,-39.337)
  Bottom Layer w0.1: v2(30.176,-58.803) 30.176,-58.244 35.531,-52.889 35.531,-47.906 35.552,-47.885 ccw(c35.362,-47.694) 35.552,-47.503 34.853,-46.804 cw(c35.044,-46.613) 34.853,-46.422 34.895,-46.379 cw(c35.086,-46.57) 35.277,-46.379 36.168,-47.27 36.771,-47.873 ccw(c36.961,-47.682) 37.152,-47.873 37.195,-47.83 ccw(c37.004,-47.639) 37.195,-47.448 36.592,-46.846 35.702,-45.955 cw(c35.892,-45.764) 35.702,-45.573 35.744,-45.531 cw(c35.935,-45.722) 36.126,-45.531 37.016,-46.421 37.619,-47.024 ccw(c37.81,-46.833) 38.001,-47.024 38.043,-46.982 ccw(c37.852,-46.791) 38.043,-46.6 37.44,-45.997 36.55,-45.107 cw(c36.741,-44.916) 36.55,-44.725 36.592,-44.682 cw(c36.783,-44.873) 36.974,-44.682 37.865,-45.573 38.468,-46.176 ccw(c38.659,-45.985) 38.849,-46.176 38.892,-46.133 ccw(c38.701,-45.942) 38.892,-45.751 38.289,-45.149 37.399,-44.258 cw(c37.589,-44.067) 37.399,-43.876 37.441,-43.834 cw(c37.632,-44.025) 37.823,-43.834 38.713,-44.724 39.316,-45.327 ccw(c39.507,-45.136) 39.698,-45.327 39.74,-45.285 ccw(c39.549,-45.094) 39.74,-44.903 39.137,-44.3 38.247,-43.41 cw(c38.438,-43.219) 38.247,-43.028 38.29,-42.985 cw(c38.48,-43.176) 38.671,-42.985 39.562,-43.876 40.165,-44.479 ccw(c40.356,-44.288) 40.546,-44.479 40.589,-44.436 ccw(c40.398,-44.245) 40.589,-44.054 39.986,-43.451 39.096,-42.561 cw(c39.287,-42.37) 39.096,-42.179 39.138,-42.137 cw(c39.329,-42.328) 39.52,-42.137 40.41,-43.027 41.013,-43.63 ccw(c41.204,-43.439) 41.395,-43.63 41.437,-43.588 ccw(c41.247,-43.397) 41.437,-43.206 41.025,-42.794 cw(c41.216,-42.603) 41.025,-42.412 42.006,-41.431 v2(44.1,-39.337)
NetR25_1: R25.1 U8.10 | length 11
  Top Layer w0.1: v2(38.75,-37.1) U8.10@38.75,-35.4 ; v2(46.525,-37.8) 46.582,-37.743 46.705,-37.743 47.335,-37.113 R25.1@47.46,-37.113
  Bottom Layer w0.1: v2(38.75,-37.1) 39.225,-37.575 41.825,-37.575 42.05,-37.8 v2(46.525,-37.8)
NetR28_1: R28.1 U10.2 | length 3.2
  Top Layer w0.15: R28.1@71.47,-72.587 71.512,-72.545 74.225,-72.545 U10.2@74.5,-72.27
NetR28_2: R28.2 R31.1 R37.2 U10.1 | length 24.8
  Top Layer w0.15: R31.1@61.505,-70.8 61.78,-70.525 61.78,-69.899 63.054,-68.625 68.758,-68.625 R28.2@71.345,-71.212 ; R37.2@67.817,-79.072 67.817,-74.865 71.07,-71.612 71.07,-71.487 R28.2@71.345,-71.212 ; U10.1@74.5,-71 74.225,-71.275 71.533,-71.275 R28.2@71.47,-71.212 R28.2@71.345,-71.212
NetR29_2: R29.2 R30.1 U10.6 | length 7.5
  Top Layer w0.15: U10.6@79.5,-73.54 79.775,-73.265 80.423,-73.265 82.375,-71.312 R29.2@82.5,-71.312 82.5,-70.438 80.687,-68.625 R30.1@80.687,-68.5
  Top Layer w0.3: U10.6@79.5,-73.54 U10.6@79.505,-73.545
NetR30_2: R30.2 R36.1 U10.7 | length 22.9
  Top Layer w0.15: R36.1@64.317,-71.987 64.36,-71.945 v1(67.93,-71.945) ; v1(71.075,-69.535) 74.703,-69.535 77.163,-71.995 79.225,-71.995 U10.7@79.5,-72.27 80.15,-72.27 81.177,-71.243 81.177,-70.489 79.312,-68.625 R30.2@79.312,-68.5
  Bottom Layer w0.15: v1(67.93,-71.945) 70.34,-69.535 v1(71.075,-69.535)
NetR34_2: R34.2 U10.3 | length 4.6
  Top Layer w0.15: U10.3@74.5,-73.54 75.15,-73.54 76.637,-75.027 76.637,-76.525 R34.2@76.912,-76.8
NetR41_1: R41.1 U13.2 | length 3.5
  Top Layer w0.15: R41.1@71.015,-57.357 71.102,-57.27 U13.2@74.5,-57.27
NetR41_2: R41.2 R44.1 R50.2 U13.1 | length 24.3
  Top Layer w0.15: R44.1@61.505,-55.92 61.505,-55.795 61.78,-55.52 61.78,-55.025 62.725,-54.08 68.988,-54.08 R41.2@70.89,-55.982 ; R50.2@67.817,-64.112 67.817,-59.18 70.615,-56.382 70.615,-56.257 R41.2@70.89,-55.982 ; U13.1@74.5,-56 71.032,-56 R41.2@71.015,-55.982 R41.2@70.89,-55.982
NetR42_2: R42.2 R43.1 U13.6 | length 7.7
  Top Layer w0.15: U13.6@79.65,-58.69 U13.6@79.5,-58.54 80.15,-58.54 80.425,-58.265 80.425,-58.262 82.375,-56.312 R42.2@82.5,-56.312 82.5,-55.438 80.687,-53.625 R43.1@80.687,-53.5
NetR43_2: R43.2 R49.1 U13.7 | length 22.9
  Top Layer w0.15: R49.1@64.317,-57.067 67.262,-57.067 v1(67.315,-57.12) ; v1(71.1,-54.53) 75.165,-54.53 77.905,-57.27 U13.7@79.5,-57.27 80.15,-57.27 81.04,-56.38 81.04,-55.353 79.312,-53.625 R43.2@79.312,-53.5
  Bottom Layer w0.15: v1(67.315,-57.12) 69.905,-54.53 v1(71.1,-54.53)
NetR47_2: R47.2 U13.3 | length 4.6
  Top Layer w0.15: U13.3@74.5,-58.54 75.15,-58.54 77.007,-60.397 77.007,-61.365 R47.2@77.282,-61.64
NetR54_1: R54.1 U16.2 | length 3.8
  Top Layer w0.15: R54.1@71.055,-44.212 71.077,-44.19 U16.2@74.818,-44.19
NetR54_2: R54.2 R57.1 R63.2 U16.1 | length 24.5
  Top Layer w0.15: R57.1@61.505,-42.3 61.505,-42.175 61.78,-41.9 61.905,-41.9 63.02,-40.785 68.878,-40.785 R54.2@70.93,-42.837 ; R63.2@67.817,-51.112 67.817,-46.075 70.655,-43.237 70.655,-43.112 R54.2@70.93,-42.837 ; U16.1@74.818,-42.92 74.735,-42.837 R54.2@71.055,-42.837 R54.2@70.93,-42.837
NetR55_2: R55.2 R56.1 U16.6 | length 7.6
  Top Layer w0.15: U16.6@79.818,-45.46 80.467,-45.46 82.1,-43.827 82.1,-43.587 R55.2@82.375,-43.312 ; R56.1@81.062,-40 81.062,-40.125 82.1,-41.163 82.1,-43.037 R55.2@82.375,-43.312 ; R55.2@82.5,-43.312 R55.2@82.375,-43.312
  Top Layer w0.3: U16.6@79.818,-45.46 U16.6@79.83,-45.447
NetR56_2: R56.2 R62.1 U16.7 | length 23.4
  Top Layer w0.15: R62.1@64.317,-43.487 66.958,-43.487 v1(68.04,-42.405) ; v1(71.065,-41.085) 74.795,-41.085 77.9,-44.19 U16.7@79.818,-44.19 80.467,-44.19 81.043,-43.615 81.043,-41.48 79.687,-40.125 R56.2@79.687,-40
  Bottom Layer w0.15: v1(68.04,-42.405) 69.36,-41.085 v1(71.065,-41.085)
NetR60_2: R60.2 U16.3 | length 4.6
  Top Layer w0.15: U16.3@74.818,-45.46 75.467,-45.46 77.317,-47.31 77.317,-48.225 R60.2@77.592,-48.5
NetR66_1: R66.1 R74.1 U1.102 | length 75.6
  Top Layer w0.15: R66.1@10.187,-25.901 10.187,-26.026 20.15,-35.988 v2(20.15,-47.15) ; R74.1@16.287,-55.074 16.287,-54.949 19.837,-51.4 v2(22.731,-51.4) 22.731,-51.365 20.15,-48.785 v2(20.15,-48.75) ; v2(36.725,-71.775) 36.725,-71.825 v2(40,-75.1) ; v2(42,-76.469) 43.22,-76.469 44.056,-77.305 44.056,-78.281 U1.102@44.13,-78.355
  Bottom Layer w0.15: v2(20.15,-48.75) v2(20.15,-47.15) ; v2(22.731,-51.4) 27.645,-56.314 27.645,-62.695 v2(36.725,-71.775) ; v2(40,-75.1) 40.45,-75.55 41.066,-75.55 41.984,-76.469 v2(42,-76.469)
NetR67_1: R67.1 R75.1 U1.103 | length 68.2
  Top Layer w0.15: R67.1@10.187,-32.17 14.37,-32.17 19.45,-37.25 19.45,-47.4 ; R75.1@16.287,-45.107 16.287,-45.232 16.562,-45.507 17.557,-45.507 19.45,-47.4 ; v2(23.4,-51.35) 19.45,-47.4 ; v2(37.425,-71.82) 37.464,-71.82 40.744,-75.1 v2(41.4,-75.1) ; v2(43.95,-76.5) 44.63,-77.18 U1.103@44.63,-78.355
  Bottom Layer w0.15: v2(23.4,-51.35) 27.945,-55.895 27.945,-62.34 v2(37.425,-71.82) ; v2(41.4,-75.1) 42.55,-75.1 v2(43.95,-76.5)
NetR68_1: R68.1 R69.1 R70.1 TR1.2 | length 9.8
  Top Layer w0.15: R68.1@12.798,-50.32 R68.1@12.898,-50.42 ; R69.1@12.798,-48.52 R69.1@12.898,-48.42
  Top Layer w0.3: R68.1@12.798,-50.32 R69.1@12.798,-48.52 ; R69.1@12.898,-48.42 12.898,-47.37 ; R70.1@12.898,-46.42 12.898,-47.37 ; TR1.2@18.16,-48.42 18.06,-48.42 17.01,-47.37 12.898,-47.37
NetR71_1: R71.1 R72.1 R73.1 TR2.2 | length 9.6
  Top Layer w0.3: R71.1@12.797,-41.87 R72.1@12.797,-39.87 R73.1@12.797,-37.87 13.597,-37.87 14.147,-38.42 TR2.2@18.16,-38.42
NetU1_27: U1.27 U8.13 | length 30.3
  Top Layer w0.1: v2(34.13,-58.607) U1.27@34.13,-57.105 ; v2(38.025,-51.85) 42.45,-47.425 42.45,-44.717 43.1,-44.067 43.1,-41.25 42.45,-40.6 42.45,-36.595 40.605,-34.75 U8.13@40.4,-34.75
  Bottom Layer w0.1: v2(34.13,-58.607) 37.823,-54.915 37.823,-52.133 38.025,-51.931 v2(38.025,-51.85)
NetU1_74: U1.74 U8.18 | length 63.6
  Top Layer w0.1: U1.74@30.13,-78.355 30.15,-78.335 30.15,-76.5 v2(39.95,-66.7) ; U8.18@40.4,-32.25 40.481,-32.331 40.895,-32.331 43.504,-34.94 50.124,-34.94 51.425,-36.241 51.425,-55.25 v2(49.275,-57.4)
  Bottom Layer w0.1: v2(39.95,-66.7) 39.963,-66.7 49.263,-57.4 v2(49.275,-57.4)
NetU1_111: U1.111 U11.15 U14.15 | length 74.5
  Top Layer w0.1: U1.111@49.005,-75.48 U1.111@49.105,-75.38
  Top Layer w0.15: U1.111@49.005,-75.48 50.25,-75.48 v1(50.605,-75.125) ; U11.15@67.7,-28.205 67.697,-28.202 66.447,-28.202 v1(66.445,-28.2) 66.445,-25.375 69.213,-22.607 70.053,-22.607 72.24,-20.42 72.24,-18.08 69.65,-15.49 U14.15@68.7,-15.49
  Bottom Layer w0.15: v1(50.605,-75.125) 52.86,-72.87 52.86,-64.05 55.545,-61.365 55.545,-58.955 56.81,-57.69 56.81,-42.185 63,-35.995 63,-33.455 66.755,-29.7 66.755,-28.51 v1(66.445,-28.2)
NetU1_112: U1.112 U11.18 U14.18 | length 71.1
  Top Layer w0.15: U1.112@49.005,-74.98 49.08,-74.905 50.005,-74.905 v1(50.55,-74.36) ; U11.18@67.7,-30.155 67.647,-30.103 65.647,-30.103 v1(65.595,-30.05) 65.095,-29.55 65.095,-25.98 69.36,-21.715 69.36,-20.044 70.44,-18.964 70.44,-17.92 69.96,-17.44 U14.18@68.7,-17.44
  Bottom Layer w0.15: v1(50.55,-74.36) 52.3,-72.61 52.3,-63.71 54.95,-61.06 54.95,-58.765 56.255,-57.46 56.255,-41.92 62.43,-35.745 62.43,-32.985 65.365,-30.05 v1(65.595,-30.05)
NetU1_114: U1.114 U11.16 | length 54.8
  Top Layer w0.15: U1.114@49.005,-73.98 50.14,-73.98 v1(50.505,-73.615) ; v1(65.545,-28.85) 65.547,-28.852 67.697,-28.852 U11.16@67.7,-28.855
  Bottom Layer w0.15: v1(50.505,-73.615) 51.79,-72.33 51.79,-63.41 54.36,-60.84 54.36,-58.585 55.69,-57.255 55.69,-41.66 61.87,-35.48 61.87,-32.525 v1(65.545,-28.85)
NetU1_115: U1.115 U14.16 | length 68.8
  Top Layer w0.15: U1.115@49.005,-73.48 49.08,-73.405 49.945,-73.405 v1(50.415,-72.935) ; v1(67.045,-16.2) 67.075,-16.17 68.67,-16.17 U14.16@68.7,-16.14
  Bottom Layer w0.15: v1(50.415,-72.935) 50.415,-72.905 51.34,-71.98 51.34,-63.175 53.905,-60.61 53.905,-58.4 55.185,-57.12 55.185,-41.41 61.37,-35.225 61.37,-18.72 63.89,-16.2 v1(67.045,-16.2)
NetU1_126: U1.126 U8.16 | length 65.8
  Top Layer w0.1: U8.16@40.4,-33.25 40.975,-33.25 43.373,-35.648 49.633,-35.648 50.625,-36.64 50.625,-54.49 48.01,-57.105 48.01,-57.555 46.979,-58.586 46.196,-58.586 45.805,-58.977 45.213,-58.977 45.023,-59.167 45.023,-59.759 44.485,-60.297 cw(c44.232,-60.297) 44.232,-60.55 42.437,-60.55 ccw(c42.437,-60.82) 42.167,-60.82 42.167,-60.88 ccw(c42.437,-60.88) 42.437,-61.15 44.215,-61.15 cw(c44.215,-61.42) 44.485,-61.42 44.485,-61.48 cw(c44.215,-61.48) 44.215,-61.75 42.437,-61.75 ccw(c42.437,-62.02) 42.167,-62.02 42.167,-62.08 ccw(c42.437,-62.08) 42.437,-62.35 44.215,-62.35 cw(c44.215,-62.62) 44.485,-62.62 44.485,-62.68 cw(c44.215,-62.68) 44.215,-62.95 42.437,-62.95 ccw(c42.437,-63.22) 42.167,-63.22 42.167,-63.28 ccw(c42.437,-63.28) 42.437,-63.55 44.215,-63.55 cw(c44.215,-63.82) 44.485,-63.82 44.485,-63.88 cw(c44.215,-63.88) 44.215,-64.15 42.437,-64.15 ccw(c42.437,-64.42) 42.167,-64.42 42.167,-64.48 ccw(c42.437,-64.48) 42.437,-64.75 44.215,-64.75 cw(c44.215,-65.02) 44.485,-65.02 44.485,-65.05 44.485,-65.079 47.386,-67.98 U1.126@49.005,-67.98
NetU1_128: U1.128 U8.17 | length 66
  Top Layer w0.1: U8.17@40.4,-32.75 40.467,-32.817 40.928,-32.817 43.486,-35.375 50.045,-35.375 51.055,-36.385 51.055,-54.92 48.503,-57.472 48.503,-57.702 46.855,-59.35 45.819,-59.35 45.63,-59.539 45.63,-59.85 45.63,-60.055 ccw(c45.9,-60.055) 45.9,-60.325 47.085,-60.325 cw(c47.085,-60.595) 47.355,-60.595 47.355,-60.655 cw(c47.085,-60.655) 47.085,-60.925 45.63,-60.925 45.028,-60.925 ccw(c45.028,-61.195) 44.758,-61.195 44.758,-61.255 ccw(c45.028,-61.255) 45.028,-61.525 45.63,-61.525 47.085,-61.525 cw(c47.085,-61.795) 47.355,-61.795 47.355,-61.855 cw(c47.085,-61.855) 47.085,-62.125 45.63,-62.125 45.028,-62.125 ccw(c45.028,-62.395) 44.758,-62.395 44.758,-62.455 ccw(c45.028,-62.455) 45.028,-62.725 45.63,-62.725 47.085,-62.725 cw(c47.085,-62.995) 47.355,-62.995 47.355,-63.055 cw(c47.085,-63.055) 47.085,-63.325 45.63,-63.325 45.028,-63.325 ccw(c45.028,-63.595) 44.758,-63.595 44.758,-63.655 ccw(c45.028,-63.655) 45.028,-63.925 45.63,-63.925 47.085,-63.925 cw(c47.085,-64.195) 47.355,-64.195 47.355,-64.255 cw(c47.085,-64.255) 47.085,-64.525 45.63,-64.525 45.028,-64.525 ccw(c45.028,-64.795) 44.758,-64.795 44.758,-64.855 ccw(c45.028,-64.855) 45.028,-65.125 45.36,-65.125 cw(c45.36,-65.395) 45.63,-65.395 45.63,-65.425 47.085,-66.88 48.252,-66.88 U1.128@48.275,-66.903
NetU11_3: U11.3 U12.7 | length 7.2
  Top Layer w0.15: U11.3@74.7,-30.155 74.715,-30.14 81.538,-30.14 U12.7@81.788,-29.89
NetU11_5: U11.5 U12.6 | length 7.2
  Top Layer w0.15: U11.5@74.7,-28.855 81.553,-28.855 U12.6@81.788,-28.62
NetU11_6: U11.6 U12.5 | length 7.4
  Top Layer w0.15: U11.6@74.7,-28.205 80.12,-28.205 80.975,-27.35 U12.5@81.788,-27.35
NetU14_3: U14.3 U15.7 | length 6.4
  Top Layer w0.15: U14.3@75.7,-17.44 78.393,-17.44 79.158,-16.675 U15.7@81.788,-16.675
NetU14_5: U14.5 U15.6 | length 6.4
  Top Layer w0.15: U14.5@75.7,-16.14 78.408,-16.14 79.143,-15.405 U15.6@81.788,-15.405
NetU14_6: U14.6 U15.5 | length 6.6
  Top Layer w0.15: U14.6@75.7,-15.49 78.098,-15.49 79.453,-14.135 U15.5@81.788,-14.135
REF_2.048V: C15.2 C16.2 C17.2 C56.2 R35.2 R39.2 R48.2 R52.2 R61.2 R65.2 U1.32 U5.1 | length 127.4
  Top Layer w0.15: R35.2@60.317,-74.488 60.418,-74.387 64.042,-74.387 R39.2@64.317,-74.112 R39.2@64.5,-74.295 ; R61.2@60.34,-46.028 60.48,-45.887 64.042,-45.887 R65.2@64.317,-45.612 ; R48.2@60.583,-59.343 R52.2@64.055,-59.343 ; C56.2@64.317,-77.612 C56.2@64.442,-77.612 ; v1@64.317,-72.997 v1(64.325,-72.99)
  Top Layer w0.3: U5.1@14.386,-65.823 14.38,-65.816 14.38,-63.379 C17.2@14.373,-63.373 14.373,-63.248 15.081,-62.54 20.203,-62.54 C16.2@22.913,-65.25 ; C16.2@23,-65.213 22.95,-65.213 C16.2@22.913,-65.25 ; C15.2@25.375,-64.168 25.375,-65.225 25.4,-65.25 ; v2(26.2,-65.225) 26.175,-65.25 25.4,-65.25 ; v2(29.075,-65.225) 29.075,-64.985 31.455,-62.605 31.455,-59.925 31.754,-59.925 32.039,-60.21 v1(32.105,-60.21) ; 31.588,-59.883 31.588,-59.018 31.603,-59.003 31.603,-58.392 31.63,-58.365 U1.32@31.63,-57.105 ; v1(41.145,-68.825) 42.155,-68.825 47.04,-73.71 v1@47.07,-73.71 ; v1(63.29,-64.99) 63.29,-63.64 65.32,-61.61 65.32,-59.63 65.033,-59.343 64.605,-59.343 R52.2@64.33,-59.067 R52.2@64.455,-59.067 ; R39.2@64.317,-74.112 v1@64.317,-72.997 ; R65.2@64.317,-45.612 64.442,-45.612 65.445,-46.615 65.445,-47.32 64.85,-47.915 v1(64.85,-48.125) ; C56.2@64.442,-77.612 64.442,-77.368 65.51,-76.3 65.51,-74.515 65.29,-74.295 R39.2@64.5,-74.295 ; C16.2@22.913,-65.25 25.4,-65.25 ; 14.308,-64.223 14.308,-64.098 14.32,-64.11 14.32,-64.235 14.308,-64.223
  Bottom Layer w0.3: v2(26.2,-65.225) v2(29.075,-65.225) ; v1(32.105,-60.21) 40.695,-68.8 41.12,-68.8 v1(41.145,-68.825) ; v1(46.97,-73.71) 49.265,-76.005 50.635,-76.005 57.865,-68.775 59.54,-68.775 63.29,-65.025 63.325,-65.025 64.635,-66.335 64.635,-72.68 v1(64.325,-72.99) ; v1(63.29,-64.99) 64.85,-63.43 v1(64.85,-48.125)
RX_N: R13.1 U7.4 U8.22 U9.8 | length 16.5
  Top Layer w0.11: R13.1@35.487,-29.7 35.487,-29.825 35.782,-30.12 36.254,-30.12 36.884,-30.75 v2(37.25,-30.75) ; U8.22@38.25,-31.6 38.25,-31.395 38.131,-31.276 38.131,-30.5 ; v2(38.5,-30.5) 38.131,-30.5 ; U9.8@42.777,-25.222 42.945,-25.39 43.605,-26.05 U7.4@44.55,-26.05 ; U9.8@42.945,-25.01 42.68,-25.275 42.68,-25.74 40.92,-27.5 38.96,-27.5 37.436,-29.024 37.436,-29.614 38.131,-30.31 38.131,-30.5
  GND1 w0.11: v2@38.483,-30.5 v2(38.5,-30.5)
  Bottom Layer w0.11: v2(37.25,-30.75) 38.233,-30.75 v2@38.483,-30.5
RX_P: R12.1 U7.6 U8.23 U9.6 | length 19.9
  Top Layer w0.11: R12.1@34.537,-27.85 34.537,-27.975 35.086,-28.524 35.932,-28.524 36.615,-29.207 37.108,-29.207 ; U8.23@37.75,-31.6 37.75,-31.395 37.869,-31.276 37.869,-30.419 37.173,-29.723 37.173,-28.915 38.851,-27.237 40.811,-27.237 41.806,-26.242 41.806,-26.105 41.696,-25.995 40.524,-25.995 ; U9.6@40.405,-25.01 U9.6@40.405,-25.37 ; U9.6@40.636,-25.601 U9.6@40.405,-25.37 ; v2(40.655,-26.51) 40.649,-26.504 40.649,-26.119 40.524,-25.995 ; v2(42.5,-27.25) 43.2,-27.95 U7.6@44.55,-27.95 ; U9.6@40.405,-25.37 40.405,-25.876 40.524,-25.995
  Bottom Layer w0.11: v2(40.655,-26.51) 41.395,-27.25 v2(42.5,-27.25)
RXC_N: CN7.6 U9.9 | length 6.5
  Top Layer w0.11: CN7.6@39.9,-13.06 39.099,-13.06 39.012,-13.148 39.012,-13.272 39.614,-13.875 40.973,-13.875 41.826,-14.728 41.826,-14.977 41.914,-15.065 42.4,-15.065 42.945,-15.61 U9.9@42.945,-15.99
RXC_P: CN7.3 U9.11 | length 7.2
  Top Layer w0.11: CN7.3@36.84,-11.96 37.785,-11.96 38.709,-12.884 38.709,-13.397 39.489,-14.177 40.848,-14.177 40.848,-15.167 40.405,-15.61 U9.11@40.405,-15.99
TX_N: R11.1 U7.3 U8.20 U9.3 | length 20
  Top Layer w0.11: v2(36.39,-26.405) 36.39,-25.595 U9.3@36.595,-25.39 ; v2(39.139,-28.611) 39.168,-28.64 39.168,-31.025 ; U8.20@39.25,-31.395 39.168,-31.313 39.168,-31.025 ; v2(43.313,-28.5) 42.905,-28.908 42.905,-30.082 42.552,-30.435 42.552,-31.205 R11.1@42.258,-31.5 41.658,-30.9 39.293,-30.9 39.168,-31.025 ; v2(45.864,-27.237) 45.879,-27.223 45.879,-26.871 46.7,-26.05 U7.3@46.95,-26.05
  Bottom Layer w0.11: v2(36.39,-26.405) 36.085,-26.71 36.085,-26.963 36.901,-27.779 38.104,-27.779 38.889,-28.564 39.092,-28.564 v2(39.139,-28.611) ; v2(43.313,-28.5) 44.601,-28.5 v2(45.864,-27.237)
TX_P: R10.1 U7.1 U8.21 U9.1 | length 19.7
  Top Layer w0.11: U9.1@34.055,-25.01 34.055,-25.565 34.89,-26.4 v2(34.947,-26.4) v2@34.887,-26.34 ; U8.21@38.75,-31.395 38.75,-31.071 38.905,-30.916 38.905,-29.234 v2(38.75,-29.078) ; v2(41.25,-29.5) 42.143,-29.5 R10.1@42.258,-29.614 ; v2(46,-28.953) 46.455,-28.498 46.455,-28.195 46.7,-27.95 U7.1@46.95,-27.95
  Bottom Layer w0.11: v2(34.947,-26.4) 34.947,-26.457 35.28,-26.79 35.54,-26.79 36.792,-28.042 37.995,-28.042 38.703,-28.75 38.703,-28.953 38.75,-29 v2(38.75,-29.078) 39.172,-29.5 v2(41.25,-29.5) 45.453,-29.5 v2(46,-28.953)
TXC_N: CN7.2 U9.14 | length 4.7
  Top Layer w0.11: CN7.2@35.82,-13.06 35.327,-13.06 34.887,-13.5 34.887,-14.463 35.374,-14.95 35.95,-14.95 36.595,-15.595 U9.14@36.595,-15.99
TXC_P: CN7.1 U9.16 | length 4.7
  Top Layer w0.11: U9.16@34.055,-15.99 34.055,-15.169 34.537,-14.686 34.537,-13.405 34.055,-12.923 34.055,-12.705 CN7.1@34.8,-11.96
USART3_RX: CN4.1 U1.78 | length 6.5
  Top Layer w0.15: CN4.1@27.04,-80.65 27.815,-79.875 31.403,-79.875 32.055,-79.223 32.055,-78.43 U1.78@32.13,-78.355
USART3_TX: CN4.3 U1.77 | length 11.1
  Top Layer w0.15: CN4.3@21.96,-80.65 23.11,-79.5 31.278,-79.5 31.555,-79.223 31.555,-78.43 U1.77@31.63,-78.355
pads on no net: CN1.MH1 CN1.MH2 CN2.MH1 CN2.MH2 CN3.MH1 CN3.MH2 CN7.13(unconnected) CN8.MH1 CN8.MH2 CN9.MH1 CN9.MH2 CN10.MH1 CN10.MH2 CN11.MH1 CN11.MH2 CN12.MH1 CN12.MH2 CN13.MH1 CN13.MH2 CN14.MH1 CN14.MH2 CN15.MH1 CN15.MH2 CN16.MH1 CN16.MH2 D5.3 D6.3 D11.3 D12.3 D17.3 D18.3 M1.MH1 M2.MH1 M3.MH1 M4.MH1 U1.1 U1.2 U1.3 U1.4 U1.5 U1.7 U1.8 U1.9 U1.10 U1.11 U1.12 U1.15 U1.18 U1.19 U1.20 U1.21 U1.22 U1.26 U1.34 U1.37 U1.42 U1.46 U1.47 U1.48 U1.49 U1.50 U1.53 U1.54 U1.55 U1.56 U1.57 U1.58 U1.59 U1.60 U1.63 U1.64 U1.65 U1.66 U1.67 U1.68 U1.69 U1.70 U1.73 U1.75 U1.76 U1.79 U1.80 U1.81 U1.82 U1.85 U1.86 U1.87 U1.88 U1.89 U1.90 U1.91 U1.92 U1.93 U1.96 U1.97 U1.99 U1.100 U1.104 U1.110 U1.113 U1.116 U1.117 U1.118 U1.119 U1.122 U1.123 U1.124 U1.125 U1.127 U1.129 U1.132 U1.134 U1.137 U1.139 U1.140 U1.141 U1.142 U9.4 U9.5 U9.12 U9.13 U11.8 U11.9 U11.12 U11.13 U11.17 U12.8 U14.8 U14.9 U14.12 U14.13 U14.17 U15.8

## Polygon pours and split planes (outlines as drawn)
GND on GND1 "GND1-GND" (solid, pour order 4): 0,0 28.475,0 28.475,-17.5 48.775,-17.5 48.775,0 100,0 100,-83 0,-83
GND on GND2 "GND2-GND" (solid, pour order 12): 0.016,0.025 28.916,0.025 28.916,-17.478 48.85,-17.478 48.85,0.025 100.016,0.025 100.016,-82.975 0.016,-82.975
no net on GND2 "GND2-No Net" (solid, pour order 10): 0,0
no net on GND2 "GND2-No Net 1" (solid, pour order 8): 0,0 31.3,0
no net on GND2 "GND2-No Net 2" (solid, pour order 6): 0,0
3.3V on Bottom Layer "Bottom Layer-3.3V" (solid, remove dead copper, pour order 24): 0,0 26.7,0 26.7,-17.475 28.6,-17.475 31.65,-17.475 31.65,-29.1 35.375,-32.825 47.175,-32.825 48.225,-31.775 48.225,-17.475 48.8,-17.475 49.7,-17.475 49.7,-0.075 99.925,-0.075 100,0 100,-83 0,-83
NetC38_2 on Bottom Layer "Bottom Layer-NetC38_2" (solid, pour order 14): 32.1,-23.439 32.161,-23.5 47.725,-23.5 47.725,-31.662 47.088,-32.299 34.981,-32.406 32.128,-29.431 32.128,-23.439
GND on Top Layer "Top Layer-GND" (solid, remove dead copper, pour order 26): 0.01,-0.001 26.7,-0.001 26.7,-17.476 28.61,-17.476 31.66,-17.476 31.66,-23.5 45.025,-23.5 45.025,-17.476 48.81,-17.476 48.81,-0.076 99.935,-0.076 100.01,-0.001 100.01,-83.001 0.01,-83.001

## Keep-outs
Keep-Out Layer:
  lines w0.2: 9.838,0 0,0 0,-83 100,-83 100,0 45.4,0 45.4,-9.54 31.335,-9.54 31.335,0 29.513,0 9.838,0 ; 9.838,0 9.838,0

## Other copper
GND1:
  pour cut-out: 26.85,0 26.85,-17.5 32,-17.5 32,-23.395 32.105,-23.5 45.013,-23.5 45.013,-17.5 48.84,-17.5 48.813,-17.315 48.812,-12.262 48.812,0
GND2:
  pour cut-out: 26.75,0 26.75,-17.5 32,-17.5 32,-23.395 32.105,-23.5 45.013,-23.5 45.013,-17.5 48.84,-17.5 48.813,-17.315 48.813,-12.262 48.813,0

## Silkscreen, mask and mechanical layers (free items; w line width, h text height)
Top Overlay:
  lines w0.17: 8.3,-57.786 12.6,-57.8 ; 10.968,-42.9 13.7,-42.9 13.8,-42.8 13.8,-36.25 17.65,-36.25 17.885,-36.25 18,-36.135 18,-30.46 ; 12.6,-57.74 12.6,-52.425 11.525,-51.35 13.6,-51.35 13.6,-50.15 ; 23.6,-28.4 23.6,-30.15 23.625,-30.175 24.075,-30.175 27.365,-30.175 28.14,-30.95 30.45,-30.95 31.325,-31.825 31.325,-32.825 31.375,-32.875 34.65,-32.875 ; 27.7,-51.642 27.633,-51.575 24.1,-51.575 25.4,-52.875 25.4,-58.2 25.6,-58.4 27.95,-58.4 ; 75.975,-9.8 76.1,-9.8 78.125,-9.8 78.65,-9.275 78.65,-7.6 78.775,-7.475 80.95,-7.475
Mechanical 1:
  text "Stuckup: / --- signal / GND ---- / ------- GND -------- / ------- GND -------- / --- signal / 3.3V ---" at 63.87,21.625 h1.52
  text "stuckup JLC2113 / Solder mask sliver required between pads on U8 and U1" at 63.725,15.525 h1.3
M15 PCB Outline:
  the board outline again, w0.1